# EAGLE board WeatherICV1 (EAGLE 9.6.2)

Size 60.63 x 66.03 mm. Coordinates in mm from the lower left corner, seen from the top.
Outline: 0,0 60.63,0 60.63,66.03 0,66.03 0,0
Copper layers (1*16): Top 0.035mm / dielectric 1.5mm / Bottom 0.035mm
Design rules "default": minimum track width 6mil, minimum drill 0.35mm, track to track 6mil, track to pad 6mil, pad to pad 6mil, via to via 6mil, smd to smd 6mil, copper to edge 40mil, drill to drill 6mil, minimum pad ring 10mil, minimum via ring 8mil, stop-mask expansion 4mil, vias tented up to drill 0mil, thermal gap 10mil

## Footprints (pad centres in the part's own frame; a part is rotated, then mirrored left to right if it is on the bottom)
PSON65P250X250X100-8N = smd 0.49 x 0.45: 1 0.97,0.975; 2 0.97,0.325; 3 0.97,-0.325; 4 0.97,-0.975; 5 -0.97,-0.975; 6 -0.97,-0.325; 7 -0.97,0.325; 8 -0.97,0.975
1X02 = drill 1.016 long: 1 -1.27,0; 2 1.27,0
C5B3 = drill 0.813 pad 1.6 octagon: 1 -2.54,0; 2 2.54,0
C5B2.5 = drill 0.813 pad 1.6 octagon: 1 -2.54,0; 2 2.54,0
QS = drill 0.61 long: 1 -2.54,0; 2 2.54,0
QFN50P500X500X90-33N = smd 0.81 x 0.27: 1 -2.445,1.75; 2 -2.445,1.25; 3 -2.445,0.75; 4 -2.445,0.25; 5 -2.445,-0.25; 6 -2.445,-0.75; 7 -2.445,-1.25; 8 -2.445,-1.75; 17 2.445,-1.75; 18 2.445,-1.25; 19 2.445,-0.75; 20 2.445,-0.25; 21 2.445,0.25; 22 2.445,0.75; 23 2.445,1.25; 24 2.445,1.75 | smd 0.27 x 0.81: 9 -1.75,-2.445; 10 -1.25,-2.445; 11 -0.75,-2.445; 12 -0.25,-2.445; 13 0.25,-2.445; 14 0.75,-2.445; 15 1.25,-2.445; 16 1.75,-2.445; 25 1.75,2.445; 26 1.25,2.445; 27 0.75,2.445; 28 0.25,2.445; 29 -0.25,2.445; 30 -0.75,2.445; 31 -1.25,2.445; 32 -1.75,2.445 | smd 3.7 x 3.7: 33 0,0
1X04 = drill 1.016 long: 1 -3.81,0; 2 -1.27,0; 3 1.27,0; 4 3.81,0
SOT65P210X110-5N = smd 1.17 x 0.4: 1 -0.97,0.65; 2 -0.97,0; 3 -0.97,-0.65; 4 0.97,-0.65; 5 0.97,0.65
0204/7 = drill 0.813 octagon: 1 -3.81,0; 2 3.81,0
VMTB60 = drill 1.1 octagon: 1 -6.35,0; 2 6.35,0
AMPHENOL_10164359-00011LF = smd 0.7 x 1.2: A5 -0.5,3.03; B5 0.5,3.03 | smd 0.76 x 1.2: A9 1.52,3.03; B9 -1.52,3.03 | smd 0.8 x 1.2: A12 2.75,3.03; B12 -2.75,3.03 | drill 0.65 pad 1.15: SH1 -4.32,2.95; SH2 4.32,2.95; SH3 -4.32,-0.85; SH4 4.32,-0.85
QFN28G_0.5-5X5MM = smd 0.9 x 0.254: 1 -2.59,1.5; 2 -2.59,1; 3 -2.59,0.5; 4 -2.59,0; 5 -2.59,-0.5; 6 -2.59,-1; 7 -2.59,-1.5; 15 2.59,-1.5; 16 2.59,-1; 17 2.59,-0.5; 18 2.59,0; 19 2.59,0.5; 20 2.59,1; 21 2.59,1.5 | smd 0.254 x 0.9: 8 -1.5,-2.59; 9 -1,-2.59; 10 -0.5,-2.59; 11 0,-2.59; 12 0.5,-2.59; 13 1,-2.59; 14 1.5,-2.59; 22 1.5,2.59; 23 1,2.59; 24 0.5,2.59; 25 0,2.59; 26 -0.5,2.59; 27 -1,2.59; 28 -1.5,2.59 | smd 3.1 x 3.1: 29 0,0

## Placement (x,y rotation side)
BME280  BME280  [PSON65P250X250X100-8N]  35.56,12.7 0 top
BUTTON  [1X02]  25.4,3.81 0 top
C1  100 nF  [C5B3]  6.35,25.4 0 top
C2  100 nF  [C5B3]  6.35,31.75 0 top
C3  1uF  [C5B2.5]  6.35,39.37 0 top
C4  1uF  [C5B2.5]  6.35,45.72 0 top
C5  1uF  [C5B2.5]  20.32,31.75 0 top
C6  0.1uF  [C5B2.5]  24.13,38.1 0 top
C7  0.1uF  [C5B2.5]  15.24,38.1 0 top
C8  10 pF  [C5B3]  15.24,45.72 0 top
C9  10 pF  [C5B3]  24.13,45.72 0 top
CRYSTAL  [QS]  22.86,11.43 0 top
ESP32  ESP32-C6FH4  [QFN50P500X500X90-33N]  19.05,21.59 0 top
LCD  [1X04]  13.97,58.42 270 top
LDO  MIC5365-3.3YC5-TR  [SOT65P210X110-5N]  33.02,24.13 0 top
R1  4.7k  [0204/7]  36.83,2.54 0 top
R2  4.7k  [0204/7]  36.83,6.35 0 top
R3  220  [VMTB60]  50.8,2.54 0 top
R4  220  [VMTB60]  50.8,10.16 0 top
R5  220  [VMTB60]  49.53,36.83 90 top
R6  5.1k  [VMTB60]  49.53,25.4 0 top
R7  5.1k  [VMTB60]  50.8,17.78 0 top
R8  10k  [VMTB60]  36.83,38.1 0 top
R9  10k  [VMTB60]  36.83,30.48 0 top
RGB  [1X04]  5.08,57.15 90 top
USBC  10164359-00011LF  [AMPHENOL_10164359-00011LF]  6.35,3.81 0 top
USBTOSERIAL  INTERFACE-CP2102-GMR(QFN28)  [QFN28G_0.5-5X5MM]  5.08,16.51 0 top

## Library data of the parts
BME280 = BME280; AVAILABILITY: Unavailable; DESCRIPTION: Humidity Temperature Sensor 0 ~ 100% RH I²C, SPI ±3% 1s Surface Mount; MF: Bosch; MP: BME280; PACKAGE: LGA-8 Bosch; PRICE: None
BUTTON LCD RGB = pinhead
C1-C9 = capacitor-wima
CRYSTAL = special
ESP32 = ESP32-C6FH4 (IC); MANUFACTURER: Espressif Systems; MAXIMUM_PACKAGE_HEIGHT: 0.9mm; PARTREV: v0.5; SNAPEDA_PN: ESP32-C6FH4; STANDARD: IPC-7351B
LDO = MIC5365-3.3YC5-TR; MANUFACTURER: Micrel; MAXIMUM_PACKAGE_HEIGHT: 1.10mm; PARTREV: 3.1 - July 16, 2013; STANDARD: IPC 7351B
R1-R9 = rcl; SPICEPREFIX: R
USBC = 10164359-00011LF; MANUFACTURER: Amphenol; MAXIMUM_PACKAGE_HEIGHT: 3.26 mm; PARTREV: A; STANDARD: Manufacturer Recommendations
USBTOSERIAL = INTERFACE-CP2102-GMR_QFN28_; MPN: CP2102-GMR

## Nets
GND: BME280.1 BME280.5 BME280.7 BUTTON.2 C1.2 C2.2 C3.2 C4.2 C5.2 C6.2 C7.1 C8.2 C9.2 ESP32.33 LCD.1 LDO.2 R6.2 R7.2 RGB.2 USBC.A12 USBC.B12 USBTOSERIAL.3 USBTOSERIAL.29
N$1: ESP32.15 R3.1
N$2: C3.1 C5.1 C6.1 LDO.1 R9.1 USBC.A9 USBC.B9 USBTOSERIAL.7 USBTOSERIAL.8
N$3: ESP32.4 R8.2
N$4: ESP32.18 R5.1
N$5: C7.2 USBTOSERIAL.6
N$6: LDO.3 R9.2
N$7: ESP32.19 R4.1
N$8: R3.2 RGB.4
N$9: R4.2 RGB.3
N$10: R5.2 RGB.1
N$11: C8.1 CRYSTAL.1 ESP32.31
N$12: R6.1 USBC.A5
N$13: R7.1 USBC.B5
N$15: C9.1 CRYSTAL.2 ESP32.30
SCL: BME280.4 ESP32.27 LCD.4 R1.1
SDA: BME280.3 ESP32.26 LCD.3 R2.1
VDD: BME280.2 BME280.6 BME280.8 BUTTON.1 C1.1 C2.1 C4.1 ESP32.2 ESP32.3 ESP32.5 ESP32.20 ESP32.29 ESP32.32 LCD.2 LDO.5 R1.2 R2.2 R8.1

## Tracks (layer width: path | path; a pad name or v marks a point on that pad's centre or on a via)
GND  (22 unrouted)
N$1  (1 unrouted)
N$2  (8 unrouted)
N$3  (1 unrouted)
N$4  (1 unrouted)
N$5  (1 unrouted)
N$6  (1 unrouted)
N$7  (1 unrouted)
N$8  (1 unrouted)
N$9  (1 unrouted)
N$10  (1 unrouted)
N$11  (2 unrouted)
N$12  (1 unrouted)
N$13  (1 unrouted)
N$15  (2 unrouted)
SCL  (3 unrouted)
SDA  (3 unrouted)
VDD  (17 unrouted)

## Text on the board
tPlace: GND | Weather Station | By Vivian Zeru